# Altium PCB CubeControl.PcbDoc
Units mm, origin at the board's own origin, x right, y up, seen from the top; angles counter-clockwise.
Board outline 86.74 x 80.77 mm, 2 copper layers (Top Layer, Bottom Layer); 38 components, 31 nets, 124 pads, 4 vias.
Unrouted connection lines stored in the file: 15.
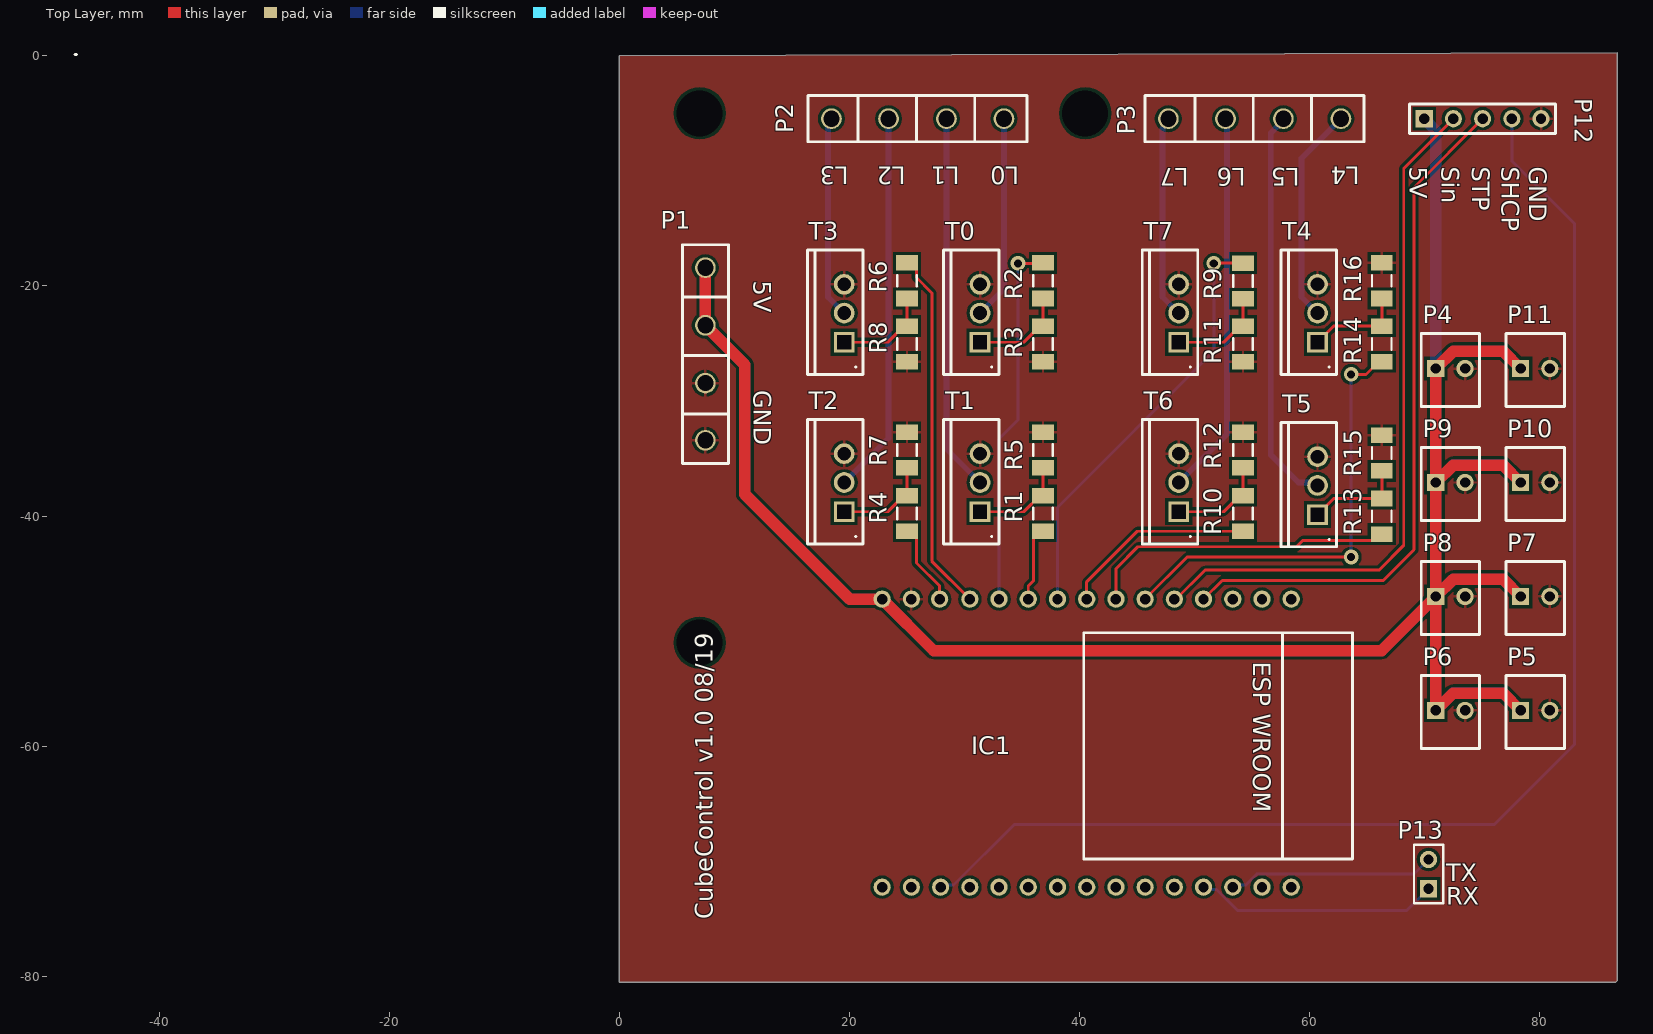
[diagram p0: Top Layer view]
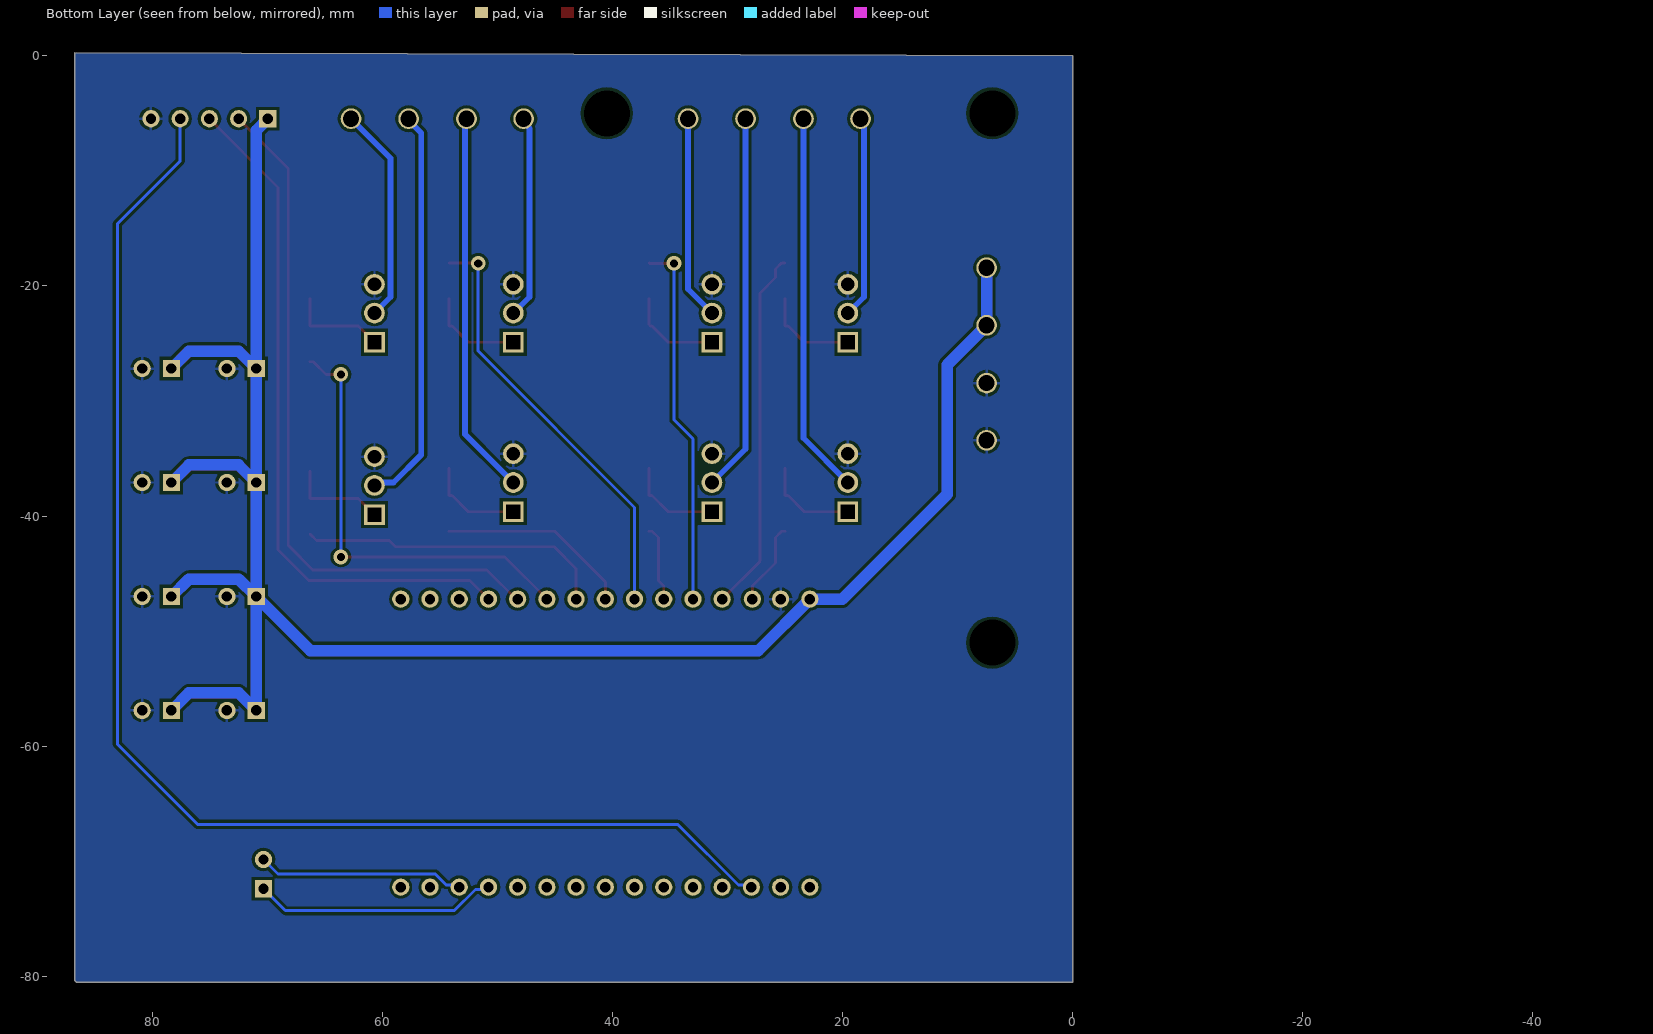
[diagram p1: Bottom Layer view, seen from below]
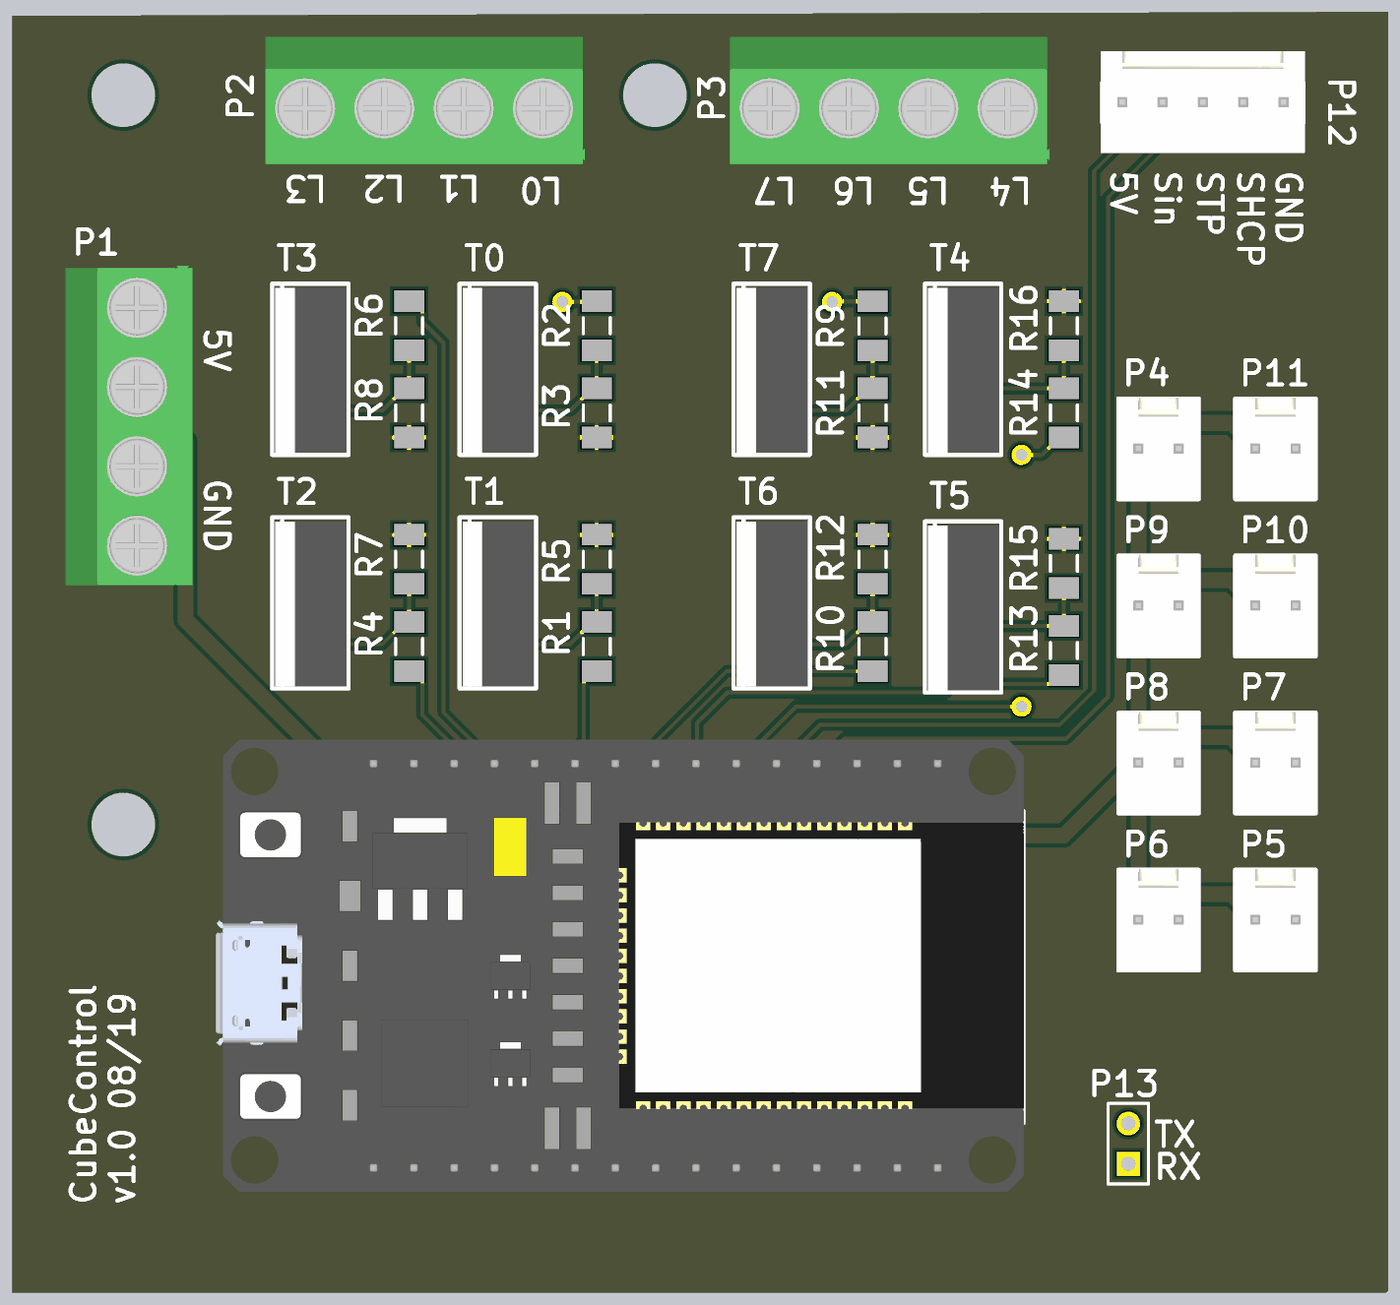
[diagram p2: 3D render of the assembled board from above, using the file's embedded part models]

## Layer stack, top to bottom
Top Solder: solder mask 0.0102, Solder Resist, Dk 3.5
Top Layer: signal copper 0.0356
Dielectric 1: dielectric 0.32, FR-4, Dk 4.8
Bottom Layer: signal copper 0.0356
Bottom Solder: solder mask 0.0102, Solder Resist, Dk 3.5

## Board outline
0,0 0,-80.518 86.614,-80.518 86.741,-80.391 86.741,0.254

## Design rules (kind name [scope] priority, off if disabled: settings)
Clearance [All] p1: gap=0.254 ignorepadtopadclearanceinfootprint=FALSE except(0: Arc-Hole Track-Hole SMDPad-Hole THPad-Hole Via-Hole Fill-Hole Poly-Hole Region-Hole Text-Hole)
PolygonConnect [All] p1: connectstyle=Relief reliefconductorwidth=0.254 reliefentries=4 polygonreliefangle="90 Angle" airgapwidth=0.254
RoutingVias [All] p1: holewidth=0.711 width=1.27 viastyle="Through Hole" minholewidth=0.711 minwidth=1.27 maxholewidth=0.711 maxwidth=1.27
SolderMaskExpansion [All] p1: expansion=0.102
Width [All] p1: maxlimit=1 minlimit=0.254 preferedwidth=0.5
30 further rules are at their usual default settings.

## Components (designator, comment, footprint, x,y, rotation, side; value= is the part's Value field where it differs from the comment)
IC1 "ESP32 Dev Module" "ESP32 Dev Module" 22.86,-47.223 r0 top
P1 "Schraubklemme" "Schraubklemme 4Pol" 7.493,-18.415 r270 top
P2 "Schraubklemme" "Schraubklemme 4Pol" 33.448,-5.461 r180 top
P3 "Schraubklemme" "Schraubklemme 4Pol" 62.738,-5.461 r180 top
P4 "PinHeader_2Pol" PinHeader_2Pol 70.993,-27.178 r0 top
P5 "PinHeader_2Pol" PinHeader_2Pol 78.359,-56.896 r0 top
P6 "PinHeader_2Pol" PinHeader_2Pol 70.993,-56.896 r0 top
P7 "PinHeader_2Pol" PinHeader_2Pol 78.359,-46.99 r0 top
P8 "PinHeader_2Pol" PinHeader_2Pol 70.993,-46.99 r0 top
P9 "PinHeader_2Pol" PinHeader_2Pol 70.993,-37.084 r0 top
P10 "PinHeader_2Pol" PinHeader_2Pol 78.359,-37.084 r0 top
P11 "PinHeader_2Pol" PinHeader_2Pol 78.359,-27.178 r0 top
P12 "Header_5" PinHeader 69.977,-5.461 r0 top
P13 "Header 2" HDR1X2 70.358,-72.39 r90 top
R1 "100R" RESC1206(3216)_M 36.845,-39.77 r90 top value="2.00 Ohm"
R2 "100R" RESC1206(3216)_M 36.845,-19.539 r270 top value="2.00 Ohm"
R3 "10k" RESC1206(3216)_M 36.845,-25.038 r90 top value="2.00 Ohm"
R4 "100R" RESC1206(3216)_M 25.019,-39.77 r90 top value="2.00 Ohm"
R5 "10k" RESC1206(3216)_M 36.845,-34.271 r270 top value="2.00 Ohm"
R6 "100R" RESC1206(3216)_M 25.019,-19.539 r270 top value="2.00 Ohm"
R7 "10k" RESC1206(3216)_M 25.019,-34.271 r270 top value="2.00 Ohm"
R8 "10k" RESC1206(3216)_M 25.019,-25.038 r90 top value="2.00 Ohm"
R9 "100R" RESC1206(3216)_M 54.229,-19.558 r270 top value="2.00 Ohm"
R10 "100R" RESC1206(3216)_M 54.229,-39.77 r90 top value="2.00 Ohm"
R11 "10k" RESC1206(3216)_M 54.229,-25.038 r90 top value="2.00 Ohm"
R12 "10k" RESC1206(3216)_M 54.229,-34.271 r270 top value="2.00 Ohm"
R13 "100R" RESC1206(3216)_M 66.294,-40.024 r90 top value="2.00 Ohm"
R14 "100R" RESC1206(3216)_M 66.294,-25.038 r90 top value="2.00 Ohm"
R15 "10k" RESC1206(3216)_M 66.294,-34.525 r270 top value="2.00 Ohm"
R16 "10k" RESC1206(3216)_M 66.294,-19.539 r270 top value="2.00 Ohm"
T0 "MOSFTET-N" TO220-3 31.369,-24.892 r90 top
T1 "MOSFTET-N" TO220-3 31.369,-39.624 r90 top
T2 "MOSFTET-N" TO220-3 19.558,-39.624 r90 top
T3 "MOSFTET-N" TO220-3 19.558,-24.892 r90 top
T4 "MOSFTET-N" TO220-3 60.706,-24.892 r90 top
T5 "MOSFTET-N" TO220-3 60.706,-39.878 r90 top
T6 "MOSFTET-N" TO220-3 48.641,-39.624 r90 top
T7 "MOSFTET-N" TO220-3 48.641,-24.892 r90 top

## Footprints (in the part's own frame and the unit in brackets; to place one, negate y for a bottom-side part, rotate by r counter-clockwise, add the part's x,y. Pads: shape width x height; smd on the part's side, far side on the other; paste and mask are expansions set on the pad)
"ESP32 Dev Module" [mm] "https://github.com/espressif/arduino-esp32/issues/544"
  round 1.5 hole 0.9: 1(0,0) 2(2.54,0) 3(5,0) 4(7.62,0) 5(10.16,0) 6(12.7,0) 7(15.24,0) 8(17.78,0) 9(20.32,0) 10(22.86,0) 11(25.4,0) 12(27.94,0) 13(30.48,0) 14(33.02,0) 15(35.56,0) 16(0,-25.04) 17(2.54,-25.04) 18(5.08,-25.04) 19(7.62,-25.04) 20(10.16,-25.04) 21(12.7,-25.04) 22(15.24,-25.04) 23(17.78,-25.04) 24(20.32,-25.04) 25(22.86,-25.04) 26(25.4,-25.04) 27(27.94,-25.04) 28(30.48,-25.04) 29(33.02,-25.04) 30(35.56,-25.04)
  silkscreen extent 17.53,-22.61 40.89,-2.92, body extent -10.01,-26.93 40.92,1.57, height 12.2
HDR1X2 [mm] "Connector; Header; 2 Position"
  rect 1.5x1.5 hole 0.9: 1(0,0)
  round 1.5 hole 0.9: 2(2.54,0)
  silkscreen extent -1.27,-1.27 3.81,1.27
PinHeader [mm] "Reichelt: RND 205-00675"
  rect 1.5x1.5 hole 0.9: 1(0,0)
  round 1.5 hole 0.9: 2(2.54,0) 3(5.08,0) 4(7.62,0) 5(10.16,0)
  silkscreen extent -1.27,-1.27 11.43,1.27, body extent -1.35,-3.17 11.51,3.22, height 11.5
PinHeader_2Pol [mm] "Reichelt: PS 25/2G WS"
  rect 1.5x1.5 hole 0.9: 1(0,0)
  round 1.5 hole 0.9: 2(2.54,0)
  silkscreen extent -1.27,-3.3 3.81,3.05, body extent -1.35,-3.3 3.89,3.1, height 11.5
RESC1206(3216)_M [mm] "Chip Resistor, Body 3.2x1.6mm, IPC Low Density"
  rect 1.35x1.9 smd: 1(-1.55,0) 2(1.55,0)
  silkscreen extent -0.5,-0.85 0.5,0.85, body extent -1.67,-0.87 1.67,0.87, height 0.75
"Schraubklemme 4Pol" [mm] "Reichelt: RND 205-00003"
  round 1.8 hole 1.4: 0(0,0) 1(5,0) 2(10.033,0) 3(15,0)
  silkscreen extent -2,-2 17.02,2, body extent -2.66,-4.13 17.49,3.87, height 10
TO220-3 [mm] "Reichelt: IRF 3708"
  rect 1.8x1.8 hole 1.2 square: 1(0,0)
  round 1.8 hole 1.2: 2(2.54,0) 3(5.04,0)
  silkscreen extent -2.79,-1.65 8,3.18, body extent -2.66,-1.52 7.74,2.98, height 20

## Part data
P1 P2 P3: "Reichelt: RND 205-00003"
P13: "Header, 2-Pin", LatestRevisionDate=17-Jul-2002, LatestRevisionNote="Re-released for DXP Platform.", Publisher="Altium Limited"
R1 R2 R4 R6 R9 R10 R13 R14: library part CMP-1014-00009-1, "2R 0.25W 5% 1206 (3216 Metric)  SMD", Case-EIA=1206, Case-Metric=3216, Power="0.25 W", Tolerance="5 %", Technology=SMT
R3 R5 R7 R8 R11 R12 R15 R16: library part CMP-1014-00009-1, "43k 0.25W 5% 1206 (3216 Metric)  SMD", Case-EIA=1206, Case-Metric=3216, Power="0.25 W", Tolerance="5 %", Technology=SMT
T0 T1 T2 T3 T4 T5 T6 T7: library part Mosfet-N, "Reichelt: IRFZ 24N", Supplier 1=Farnell

## Free pads (board coordinates)
  round 1.8 hole 4: 5(7,-5) 5(40.513,-5) 6(7,-51)

## Via types
v1: diameter 1.27, hole 0.711, Top Layer to Bottom Layer, 4 vias

## Nets (pads, with @x,y where several pads share a name; then routed paths per layer and width w, separated by ;. In a path a pad name is that pad's centre, name@x,y a point inside that pad or via, vN(x,y) a via of type N, cw(c..) or ccw(c..) an arc to the next point about the centre after c; other vN are vias at no path point)
5V: IC1.1 P1.0 P1.1 P4.1 P5.1 P6.1 P7.1 P8.1 P9.1 P10.1 P11.1 P12.1 | length 328
  Top Layer w1: P1.0 P1.1 10.922,-26.844 10.922,-38.1 20.045,-47.223 IC1.1 27.326,-51.689 66.294,-51.689 P8.1 ; P5.1 76.855,-55.392 72.497,-55.392 P6.1 P8.1 ; P7.1 76.855,-45.486 72.497,-45.486 P8.1 ; P10.1 76.855,-35.58 72.497,-35.58 P9.1 ; P11.1 76.855,-25.674 72.497,-25.674 P4.1 P9.1 ; P8.1 P9.1
  Bottom Layer w1: P1.0 P1.1 10.922,-26.844 10.922,-38.1 20.045,-47.223 IC1.1 27.326,-51.689 66.294,-51.689 P8.1 ; P12.1 70.993,-6.477 P4.1 ; P5.1 76.835,-55.372 72.517,-55.372 P6.1 P8.1 ; P7.1 76.855,-45.486 72.497,-45.486 P8.1 ; P10.1 76.835,-35.56 72.517,-35.56 P9.1 ; P11.1 76.835,-25.654 72.517,-25.654 P4.1 ; P8.1 P9.1 ; P9.1 P4.1
CATHODE_0: P2.0 T0.2 | length 17.8
  Bottom Layer w0.5: T0.2 33.448,-20.273 P2.0
CATHODE_1: P2.1 T1.2 | length 32.8
  Bottom Layer w0.5: P2.1 28.448,-34.163 T1.2
CATHODE_2: P2.2 T2.2 | length 33.2
  Bottom Layer w0.5: T2.2 23.415,-33.227 P2.2
CATHODE_3: P2.3 T3.2 | length 17.6
  Bottom Layer w0.5: P2.3 18.448,-5.813 18.154,-6.107 18.154,-20.948 T3.2
CATHODE_4: P3.0 T4.2 | length 18.9
  Bottom Layer w0.5: T4.2 59.302,-20.948 59.302,-8.897 P3.0
CATHODE_5: P3.1 T5.2 | length 34.8
  Bottom Layer w0.5: P3.1 57.738,-5.602 56.642,-6.698 56.642,-34.671 59.06,-37.089 60.457,-37.089 T5.2
CATHODE_6: P3.2 T6.2 | length 33.4
  Bottom Layer w0.5: T6.2 52.828,-32.897 52.828,-5.584 P3.2
CATHODE_7: P3.3 T7.2 | length 17.7
  Bottom Layer w0.5: P3.3 47.738,-5.813 47.237,-6.314 47.237,-20.948 T7.2
GND: IC1.2 P1.2 P1.3 P4.2 P5.2 P6.2 P7.2 P8.2 P9.2 P10.2 P11.2 P12.5 R3.1 R5.1 R7.1 R8.1 R11.1 R12.1 R15.1 R16.1 T0.3 T1.3 T2.3 T3.3 T4.3 T5.3 T6.3 T7.3
Level_0: IC1.5 R2.1 | length 32.1
  Top Layer w0.254: v1(34.671,-18.034) 36.8,-18.034 R2.1
  Bottom Layer w0.254: IC1.5 33.02,-33.285 34.671,-31.634 v1(34.671,-18.034)
Level_1: IC1.6 R1.1 | length 6.6
  Top Layer w0.254: IC1.6 35.56,-46.092 36.022,-45.63 36.022,-41.868 36.57,-41.32 R1.1
Level_2: IC1.3 R4.1 | length 7.2
  Top Layer w0.254: R4.1 25.294,-41.32 25.842,-41.868 25.842,-44.074 27.86,-46.092 IC1.3
Level_3: IC1.4 R6.1 | length 31.7
  Top Layer w0.254: R6.1 25.294,-17.989 25.842,-18.537 25.842,-19.269 27.178,-20.605 27.178,-43.921 IC1.4
Level_4: IC1.10 R14.1 | length 38.4
  Top Layer w0.254: IC1.10 49.382,-43.561 v1(63.627,-43.561) ; v1(63.627,-27.686) 64.921,-27.686 66.019,-26.588 R14.1
  Bottom Layer w0.254: v1(63.627,-43.561) v1(63.627,-27.686)
Level_5: IC1.9 R13.1 | length 27
  Top Layer w0.254: IC1.9 43.18,-44.577 45.085,-42.672 58.873,-42.672 59.423,-42.122 65.746,-42.122 R13.1
Level_6: IC1.8 R10.1 | length 16.9
  Top Layer w0.254: IC1.8 40.64,-45.72 45.04,-41.32 R10.1
Level_7: IC1.7 R9.1 | length 37.4
  Top Layer w0.254: v1(51.689,-18.034) 51.715,-18.008 R9.1
  Bottom Layer w0.254: IC1.7 38.1,-39.254 51.689,-25.665 v1(51.689,-18.034)
NetIC1_27: IC1.27 P13.1 | length 21.2
  Bottom Layer w0.254: IC1.27 50.99,-72.453 51.931,-72.453 53.773,-74.295 68.453,-74.295 P13.1
NetIC1_28: IC1.28 P13.2 | length 18
  Bottom Layer w0.254: IC1.28 53.53,-72.073 54.471,-72.073 55.424,-71.12 69.088,-71.12 P13.2
NetR1_2: R1.2 R5.2 T1.1 | length 8.5
  Top Layer w0.254: T1.1 35.166,-39.624 36.57,-38.22 R1.2 R5.2
NetR2_2: R2.2 R3.2 T0.1 | length 8.4
  Top Layer w0.254: T0.1 35.166,-24.892 36.563,-23.495 36.703,-23.495 36.845,-23.353 R2.2
NetR4_2: R4.2 R7.2 T2.1 | length 8.4
  Top Layer w0.254: T2.1 23.34,-39.624 24.744,-38.22 R4.2 R7.2
NetR6_2: R6.2 R8.2 T3.1 | length 8.4
  Top Layer w0.254: T3.1 23.34,-24.892 24.744,-23.488 R8.2 R6.2
NetR9_2: R9.2 R11.2 T7.1 | length 8.5
  Top Layer w0.254: T7.1 52.55,-24.892 53.954,-23.488 R11.2 R9.2
NetR10_2: R10.2 R12.2 T6.1 | length 8.6
  Top Layer w0.254: T6.1 52.55,-39.624 53.954,-38.22 R10.2 R12.2
NetR13_2: R13.2 R15.2 T5.1 | length 8.6
  Top Layer w0.254: T5.1 62.11,-38.474 R13.2 R15.2
NetR14_2: R14.2 R16.2 T4.1 | length 8.6
  Top Layer w0.254: T4.1 62.11,-23.488 R14.2 R16.2
SerialIn: IC1.11 P12.2 | length 60.7
  Top Layer w0.254: IC1.11 48.408,-47.223 50.927,-44.704 66.04,-44.704 68.199,-42.545 68.199,-9.779 P12.2
SHCP: IC1.18 P12.4 | length 117.2
  Bottom Layer w0.254: IC1.18 28.13,-72.073 29.071,-72.073 34.334,-66.81 76.065,-66.81 83.058,-59.817 83.058,-14.605 77.597,-9.144 P12.4 P12.4@77.359,-5.223
STP: IC1.12 P12.3 | length 60
  Top Layer w0.254: IC1.12 52.43,-45.593 66.421,-45.593 69.088,-42.926 69.088,-11.43 P12.3
pads on no net: IC1.13 IC1.14 IC1.15 IC1.16 IC1.17 IC1.19 IC1.20 IC1.21 IC1.22 IC1.23 IC1.24 IC1.25 IC1.26 IC1.29 IC1.30

## Polygon pours and split planes (outlines as drawn)
GND on Bottom Layer "Bottom Layer-GND" (solid, pour order 2): 0,0 0,-80.518 86.614,-80.518 86.741,-80.391 86.741,0.254
GND on Top Layer "Top Layer-GND" (solid, pour order 4): 0,0 0,-80.518 86.614,-80.518 86.741,-80.391 86.741,0.254

## Silkscreen, mask and mechanical layers (free items; w line width, h text height)
Top Overlay:
  lines w0.254: -47.307,0.127 -47.18,0.127
  text "L3" at 19.939,-9.652 h1.52 r180
  text "L2" at 24.892,-9.652 h1.52 r180
  text "L1" at 29.591,-9.652 h1.52 r180
  text "L0" at 34.798,-9.652 h1.52 r180
  text "L4" at 64.389,-9.652 h1.52 r180
  text "5V" at 68.707,-9.652 h1.52 r270
  text "Sin" at 71.501,-9.652 h1.52 r270
  text "STP" at 74.168,-9.652 h1.52 r270
  text "SHCP" at 76.708,-9.652 h1.52 r270
  text "GND" at 79.121,-9.652 h1.52 r270
  text "L7" at 49.53,-9.779 h1.52 r180
  text "L6" at 54.483,-9.779 h1.52 r180
  text "L5" at 59.182,-9.779 h1.52 r180
  text "5V" at 11.684,-19.558 h1.52 r270
  text "GND" at 11.684,-29.083 h1.52 r270
  text "TX" at 71.882,-71.755 h1.52
  text "RX" at 71.882,-73.787 h1.52
  text "CubeControl v1.0 08/19" at 8.128,-75.057 h1.52 r90
Mechanical 13:
  lines w0.254: 0,-80.645 0.127,-80.518 86.741,-80.518 86.741,0.254 86.487,0 0,0 0,-80.645

## Text inside footprints (layer, text, board x,y; h text height)
IC1: Top Overlay "ESP WROOM" at 55.118,-52.684 h1.52 r270